# Altium PCB NBIOT.PcbDoc (part 2 of 3)
Units mm, origin at the board's own origin, x right, y up, seen from the top; angles counter-clockwise.
Board outline 152.4 x 101.6 mm, 2 copper layers (Top Layer, Bottom Layer); 66 components, 55 nets, 202 pads, 65 vias.
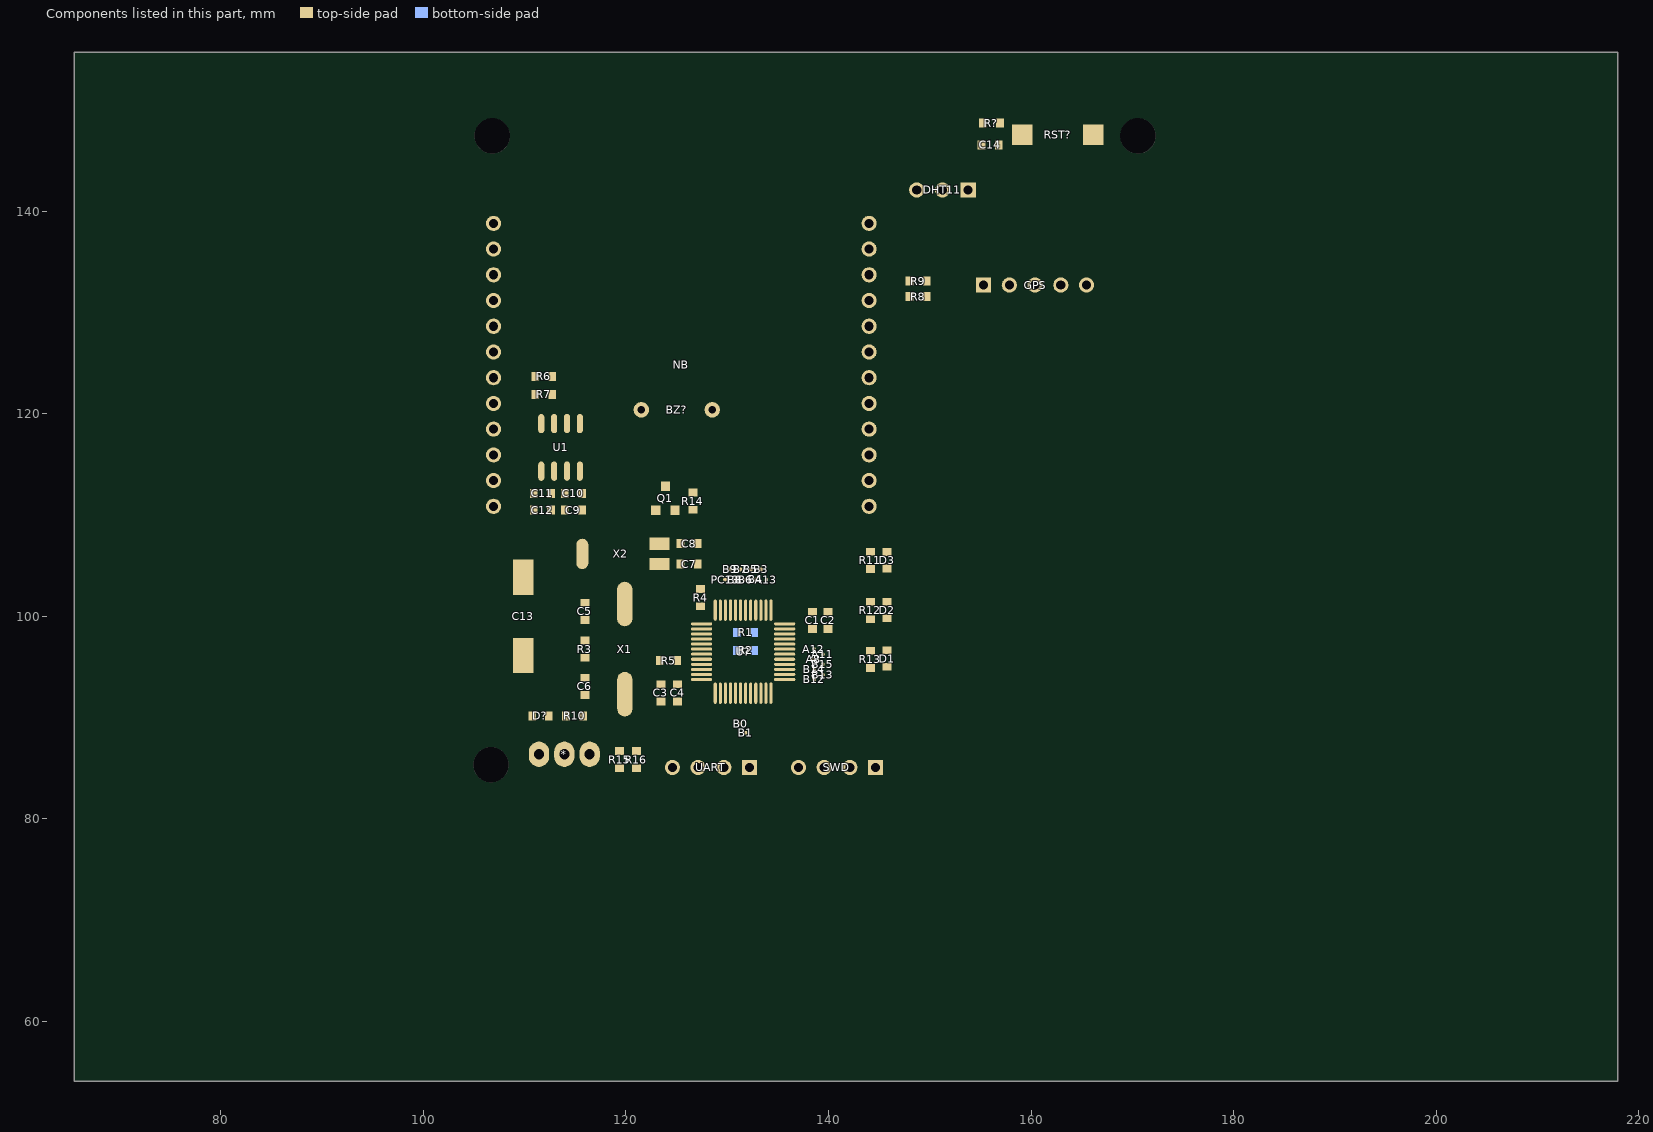
[diagram p2: the components of this part, seen from the top]

## Via types
v1: diameter 0.457, hole 0.305, Top Layer to Bottom Layer, 57 vias
v2: diameter 1.27, hole 0.711, Top Layer to Bottom Layer, 6 vias
v3: diameter 2.032, hole 1.27, Top Layer to Bottom Layer, 2 vias

## Nets (pads, with @x,y where several pads share a name; then routed paths per layer and width w, separated by ;. In a path a pad name is that pad's centre, name@x,y a point inside that pad or via, vN(x,y) a via of type N, cw(c..) or ccw(c..) an arc to the next point about the centre after c; other vN are vias at no path point) (continued)
copper on no net: (continued)
  Top Layer w0.015: 157.886,136.19 168.021,136.19 ; 157.886,136.205 168.021,136.205 ; 157.886,136.22 168.021,136.22 ; 157.886,136.235 168.021,136.235 ; 157.886,136.251 168.021,136.251 ; 157.886,136.266 168.021,136.266 ; 157.886,136.281 168.021,136.281 ; 157.886,136.296 168.021,136.296 ; 157.886,136.312 168.021,136.312 ; 157.886,136.327 168.021,136.327 ; 157.886,136.342 168.021,136.342 ; 157.886,136.357 168.021,136.357 ; 157.886,136.373 168.021,136.373 ; 157.902,136.144 168.021,136.144 ; 157.902,136.159 168.021,136.159 ; 157.902,136.174 168.021,136.174 ; 157.902,136.388 168.021,136.388 ; 157.902,136.403 168.021,136.403 ; 157.902,136.418 168.021,136.418 ; 157.902,136.434 168.006,136.434 ; 157.902,136.449 167.975,136.449 ; 157.902,136.464 167.975,136.464 ; 157.902,136.479 167.975,136.479 ; 157.902,136.495 167.975,136.495 ; 157.902,136.51 167.975,136.51 ; 157.902,136.525 167.975,136.525 ; 157.902,136.54 167.975,136.54 ; 157.902,136.555 167.975,136.555 ; 157.902,136.571 167.975,136.571 ; 157.902,136.586 167.975,136.586 ; 157.902,136.601 167.975,136.601 ; 157.902,136.616 167.975,136.616 ; 157.902,136.632 167.975,136.632 ; 157.902,136.647 167.975,136.647 ; 157.902,136.662 167.975,136.662 ; 157.902,136.677 162.245,136.677 ; 157.902,136.693 162.245,136.693 ; 157.902,136.708 162.199,136.708 ; 157.902,136.723 162.047,136.723 ; 157.902,136.738 161.879,136.738 ; 157.902,136.754 161.925,136.754 ; 157.902,136.769 161.879,136.769 ; 157.902,136.784 161.635,136.784 ; 157.902,136.799 161.605,136.799 ; 157.902,136.815 161.635,136.815 ; 157.902,136.83 161.453,136.83 ; 157.902,136.845 161.346,136.845 ; 157.902,136.86 161.361,136.86 ; 157.902,136.876 161.361,136.876 ; 157.902,136.891 161.178,136.891 ; 157.947,136.098 160.782,136.098 ; 157.947,136.129 168.021,136.129 ; 157.947,136.906 161.163,136.906 ; 157.947,136.921 161.178,136.921 ; 157.947,136.936 161.117,136.936 ; 157.947,136.952 161.011,136.952 ; 157.947,136.967 161.026,136.967 ; 157.947,136.982 161.011,136.982 ; 157.947,136.997 160.904,136.997 ; 157.947,137.013 160.873,137.013 ; 157.947,137.028 160.873,137.028 ; 157.947,137.043 160.858,137.043 ; 157.947,137.058 160.752,137.058 ; 157.947,137.074 160.752,137.074 ; 157.947,137.089 160.752,137.089 ; 157.947,137.104 160.691,137.104 ; 157.947,137.119 160.645,137.119 ; 157.947,137.135 160.645,137.135 ; 157.947,137.15 160.645,137.15 ; 157.947,137.165 160.538,137.165 ; 157.947,137.18 160.538,137.18 ; 157.947,137.196 160.538,137.196 ; 157.947,137.211 160.477,137.211 ; 157.947,137.226 160.431,137.226 ; 157.947,137.241 160.477,137.241 ; 157.947,137.257 160.431,137.257 ; 157.947,137.272 160.371,137.272 ; 157.947,137.287 160.386,137.287 ; 157.947,137.302 160.386,137.302 ; 157.963,136.114 157.978,136.114 ; 157.963,137.317 160.31,137.317 ; 157.963,137.333 157.978,137.333 ; 157.993,136.114 160.34,136.114 ; 157.993,137.333 160.279,137.333 ; 157.993,137.348 160.31,137.348 ; 157.993,137.363 160.264,137.363 ; 157.993,137.378 160.203,137.378 ; 157.993,137.394 160.203,137.394 ; 157.993,137.409 160.218,137.409 ; 157.993,137.424 160.157,137.424 ; 157.993,137.439 160.111,137.439 ; 157.993,137.455 160.157,137.455 ; 157.993,137.47 160.111,137.47 ; 157.993,137.485 160.05,137.485 ; 157.993,137.5 160.05,137.5 ; 157.993,137.516 160.05,137.516 ; 158.008,136.083 158.054,136.083 ; 158.008,137.531 160.005,137.531 ; 158.008,137.546 159.99,137.546 ; 158.008,137.561 159.99,137.561 ; 158.008,137.577 159.99,137.577 ; 158.008,137.592 159.898,137.592 ; 158.008,137.607 159.898,137.607 ; 158.008,137.622 159.898,137.622 ; 158.054,137.638 159.883,137.638 ; 158.054,137.653 159.837,137.653 ; 158.054,137.668 159.852,137.668 ; 158.054,137.683 159.837,137.683 ; 158.054,137.698 159.791,137.698 ; 158.054,137.714 159.791,137.714 ; 158.054,137.729 159.791,137.729 ; 158.054,137.744 159.791,137.744 ; 158.069,137.759 159.746,137.759 ; 158.069,137.775 158.085,137.775 ; 158.069,137.79 158.085,137.79 ; 158.069,137.805 158.085,137.805 ; 158.085,136.083 160.34,136.083 ; 158.1,137.775 159.73,137.775 ; 158.1,137.79 159.73,137.79 ; 158.1,137.805 159.73,137.805 ; 158.1,137.82 159.715,137.82 ; 158.1,137.836 159.715,137.836 ; 158.1,137.851 159.685,137.851 ; 158.115,137.866 159.685,137.866 ; 158.115,137.881 159.669,137.881 ; 158.115,137.897 159.669,137.897 ; 158.145,137.912 159.669,137.912 ; 158.161,137.927 159.624,137.927 ; 158.161,137.942 159.624,137.942 ; 158.161,137.958 159.624,137.958 ; 158.161,137.973 159.624,137.973 ; 158.161,137.988 159.624,137.988 ; 158.161,138.003 159.624,138.003 ; 158.176,138.019 159.609,138.019 ; 158.176,138.034 159.578,138.034 ; 158.176,138.049 159.578,138.049 ; 158.176,138.064 159.578,138.064 ; 158.222,138.079 159.563,138.079 ; 158.222,138.095 159.563,138.095 ; 158.222,138.11 159.563,138.11 ; 158.222,138.125 159.563,138.125 ; 158.222,138.14 159.517,138.14 ; 158.222,138.156 159.532,138.156 ; 158.222,138.171 159.517,138.171 ; 158.267,138.186 159.517,138.186 ; 158.267,138.201 159.517,138.201 ; 158.267,138.217 159.517,138.217 ; 158.267,138.232 159.502,138.232 ; 158.267,138.262 159.502,138.262 ; 158.283,138.247 159.471,138.247 ; 158.283,138.278 159.471,138.278 ; 158.283,138.293 158.298,138.293 ; 158.313,138.293 159.456,138.293 ; 158.313,138.308 159.456,138.308 ; 158.313,138.323 159.456,138.323 ; 158.328,138.339 159.456,138.339 ; 158.328,138.354 159.456,138.354 ; 158.328,138.369 159.456,138.369 ; 158.328,138.384 159.456,138.384 ; 158.328,138.4 159.41,138.4 ; 158.328,138.43 159.41,138.43 ; 158.344,138.415 159.41,138.415 ; 158.374,138.445 159.41,138.445 ; 158.374,138.46 159.395,138.46 ; 158.374,138.476 159.395,138.476 ; 158.374,138.491 159.395,138.491 ; 158.389,138.506 158.405,138.506 ; 158.389,138.521 158.405,138.521 ; 158.389,138.537 158.405,138.537 ; 158.435,138.506 159.395,138.506 ; 158.435,138.521 159.395,138.521 ; 158.435,138.537 159.395,138.537 ; 158.435,138.552 159.395,138.552 ; 158.435,138.567 159.365,138.567 ; 158.435,138.582 159.365,138.582 ; 158.435,138.598 159.365,138.598 ; 158.435,138.613 159.349,138.613 ; 158.45,138.628 159.349,138.628 ; 158.466,138.643 159.349,138.643 ; 158.481,138.659 159.349,138.659 ; 158.481,138.689 159.319,138.689 ; 158.496,138.674 159.349,138.674 ; 158.496,138.704 159.304,138.704 ; 158.496,138.72 158.511,138.72 ; 158.496,138.735 158.511,138.735 ; 158.496,138.75 158.511,138.75 ; 158.526,138.72 159.304,138.72 ; 158.526,138.735 159.304,138.735 ; 158.542,138.75 159.304,138.75 ; 158.542,138.765 159.304,138.765 ; 158.542,138.781 159.288,138.781 ; 158.542,138.796 159.288,138.796 ; 158.542,138.811 159.288,138.811 ; 158.587,138.826 159.288,138.826 ; 158.587,138.857 159.288,138.857 ; 158.603,138.841 159.288,138.841 ; 158.603,138.872 159.288,138.872 ; 158.648,138.887 159.288,138.887 ; 158.648,138.902 159.288,138.902 ; 158.648,138.918 159.288,138.918 ; 158.664,138.933 159.288,138.933 ; 158.709,138.948 159.288,138.948 ; 158.709,138.963 159.288,138.963 ; 158.709,138.979 159.288,138.979 ; 158.709,138.994 158.725,138.994 ; 158.709,139.009 158.725,139.009 ; 158.709,139.024 158.725,139.024 ; 158.74,138.994 159.288,138.994 ; 158.74,139.009 159.288,139.009 ; 158.74,139.024 159.288,139.024 ; 158.755,139.04 159.288,139.04 ; 158.801,139.055 159.288,139.055 ; 158.801,139.07 159.288,139.07 ; 158.801,139.085 159.288,139.085 ; 158.816,139.101 159.288,139.101 ; 158.816,139.116 159.288,139.116 ; 158.816,139.131 159.288,139.131 ; 158.862,139.146 159.288,139.146 ; 158.862,139.162 159.288,139.162 ; 158.862,139.177 159.288,139.177 ; 158.877,139.192 158.892,139.192 ; 158.907,139.192 159.288,139.192 ; 158.923,139.207 159.288,139.207 ; 158.923,139.222 159.288,139.222 ; 158.923,139.238 159.288,139.238 ; 158.938,139.253 159.288,139.253 ; 158.968,139.268 159.288,139.268 ; 158.984,139.283 159.288,139.283 ; 158.984,139.299 159.288,139.299 ; 159.029,139.314 159.258,139.314 ; 159.029,139.329 159.258,139.329 ; 159.029,139.344 159.258,139.344 ; 159.045,139.36 159.06,139.36 ; 159.075,139.36 159.243,139.36 ; 159.09,139.375 159.243,139.375 ; 159.09,139.39 159.243,139.39 ; 159.09,139.405 159.243,139.405 ; 159.121,139.421 159.243,139.421 ; 159.136,139.436 159.243,139.436 ; 159.136,139.451 159.243,139.451 ; 159.136,139.466 159.243,139.466 ; 159.136,139.482 159.243,139.482 ; 159.136,139.497 159.243,139.497 ; 159.136,139.512 159.243,139.512 ; 159.136,139.527 159.243,139.527 ; 159.136,139.543 159.243,139.543 ; 159.136,139.558 159.243,139.558 ; 159.136,139.573 159.243,139.573 ; 159.136,139.588 159.243,139.588 ; 159.136,139.603 159.243,139.603 ; 159.136,139.619 159.243,139.619 ; 159.136,139.634 159.243,139.634 ; 159.136,139.649 159.243,139.649 ; 159.136,139.664 159.243,139.664 ; 159.136,139.68 159.243,139.68 ; 159.136,139.695 159.243,139.695 ; 159.136,139.71 159.243,139.71 ; 159.136,139.725 159.258,139.725 ; 159.136,139.741 159.258,139.741 ; 159.136,139.756 159.288,139.756 ; 159.136,139.771 159.288,139.771 ; 159.136,139.786 159.288,139.786 ; 159.136,139.802 159.288,139.802 ; 159.136,139.817 159.288,139.817 ; 159.136,139.832 159.288,139.832 ; 159.151,139.847 159.288,139.847 ; 159.151,139.863 159.288,139.863 ; 159.151,139.878 159.288,139.878 ; 159.182,139.893 159.288,139.893 ; 159.182,139.908 159.304,139.908 ; 159.182,139.924 159.304,139.924 ; 159.182,139.939 159.304,139.939 ; 159.182,139.954 159.304,139.954 ; 159.182,139.969 159.304,139.969 ; 159.182,139.984 159.304,139.984 ; 159.182,140 159.304,140 ; 159.197,140.015 159.349,140.015 ; 159.197,140.03 159.349,140.03 ; 159.197,140.045 159.349,140.045 ; 159.197,140.061 159.349,140.061 ; 159.212,140.091 159.228,140.091 ; 159.212,140.106 159.228,140.106 ; 159.228,140.076 159.349,140.076 ; 159.243,140.091 159.349,140.091 ; 159.243,140.106 159.349,140.106 ; 159.243,140.122 159.395,140.122 ; 159.243,140.137 159.395,140.137 ; 159.243,140.152 159.395,140.152 ; 159.243,140.167 159.395,140.167 ; 159.243,140.183 159.41,140.183 ; 159.243,140.198 159.41,140.198 ; 159.258,139.36 159.288,139.36 ; 159.258,140.213 159.41,140.213 ; 159.273,139.314 159.288,139.314 ; 159.273,139.329 159.288,139.329 ; 159.273,139.344 159.288,139.344 ; 159.273,139.725 159.288,139.725 ; 159.273,139.741 159.288,139.741 ; 159.288,140.228 159.456,140.228 ; 159.304,140.244 159.456,140.244 ; 159.304,140.259 159.456,140.259 ; 159.304,140.274 159.456,140.274 ; 159.304,140.289 159.456,140.289 ; 159.304,140.305 159.319,140.305 ; 159.304,140.32 159.319,140.32 ; 159.334,138.689 159.349,138.689 ; 159.334,140.305 159.456,140.305 ; 159.334,140.32 159.456,140.32 ; 159.349,140.335 159.502,140.335 ; 159.365,140.35 159.517,140.35 ; 159.365,140.365 159.517,140.365 ; 159.365,140.381 159.38,140.381 ; 159.38,138.567 159.395,138.567 ; 159.38,138.582 159.395,138.582 ; 159.395,140.381 159.517,140.381 ; 159.395,140.396 159.517,140.396 ; 159.395,140.411 159.517,140.411 ; 159.395,140.426 159.517,140.426 ; 159.41,140.442 159.532,140.442 ; 159.41,140.457 159.441,140.457 ; 159.41,140.472 159.563,140.472 ; 159.456,140.457 159.563,140.457 ; 159.456,140.487 159.563,140.487 ; 159.456,140.503 159.563,140.503 ; 159.456,140.518 159.563,140.518 ; 159.456,140.533 159.563,140.533 ; 159.456,140.548 159.563,140.548 ; 159.456,140.564 159.563,140.564 ; 159.456,140.579 159.563,140.579 ; 159.456,140.594 159.563,140.594 ; 159.456,140.609 159.609,140.609 ; 159.456,140.625 159.609,140.625 ; 159.456,140.64 159.609,140.64 ; 159.456,140.655 159.609,140.655 ; 159.471,140.67 159.609,140.67 ; 159.471,140.686 159.609,140.686 ; 159.471,140.701 159.487,140.701 ; 159.487,138.247 159.502,138.247 ; 159.487,138.278 159.502,138.278 ; 159.502,140.701 159.624,140.701 ; 159.502,140.716 159.624,140.716 ; 159.502,140.731 159.624,140.731 ; 159.502,140.746 159.624,140.746 ; 159.517,140.762 159.624,140.762 ; 159.517,140.777 159.624,140.777 ; 159.517,140.792 159.654,140.792 ; 159.517,140.807 159.654,140.807 ; 159.517,140.823 159.669,140.823 ; 159.517,140.838 159.669,140.838 ; 159.517,140.853 159.669,140.853 ; 159.532,140.868 159.669,140.868 ; 159.548,140.442 159.563,140.442 ; 159.563,140.884 159.685,140.884 ; 159.563,140.899 159.685,140.899 ; 159.563,140.914 159.685,140.914 ; 159.563,140.929 159.73,140.929 ; 159.563,140.945 159.73,140.945 ; 159.563,140.96 159.73,140.96 ; 159.578,140.975 159.73,140.975 ; 159.609,140.99 159.73,140.99 ; 159.609,141.006 159.73,141.006 ; 159.609,141.021 159.73,141.021 ; 159.624,141.036 159.776,141.036 ; 159.624,141.051 159.776,141.051 ; 159.624,141.067 159.776,141.067 ; 159.624,141.082 159.776,141.082 ; 159.669,141.097 159.791,141.097 ; 159.669,141.112 159.791,141.112 ; 159.669,141.127 159.791,141.127 ; 159.669,141.143 159.791,141.143 ; 159.669,141.158 159.837,141.158 ; 159.669,141.173 159.837,141.173 ; 159.685,141.188 159.837,141.188 ; 159.7,137.851 159.715,137.851 ; 159.715,141.204 159.837,141.204 ; 159.715,141.219 159.837,141.219 ; 159.715,141.234 159.837,141.234 ; 159.73,141.249 159.837,141.249 ; 159.73,141.265 159.837,141.265 ; 159.73,141.28 159.837,141.28 ; 159.73,141.295 159.852,141.295 ; 159.73,141.31 159.746,141.31 ; 159.776,141.31 159.883,141.31 ; 159.776,141.326 159.883,141.326 ; 159.776,141.341 159.883,141.341 ; 159.776,141.356 159.898,141.356 ; 159.776,141.371 159.944,141.371 ; 159.776,141.387 159.913,141.387 ; 159.776,141.402 159.944,141.402 ; 159.791,141.417 159.807,141.417 ; 159.791,141.432 159.944,141.432 ; 159.807,137.698 159.822,137.698 ; 159.807,141.448 159.944,141.448 ; 159.822,141.417 159.944,141.417 ; 159.837,141.463 159.959,141.463 ; 159.837,141.478 159.99,141.478 ; 159.837,141.493 159.99,141.493 ; 159.837,141.508 159.99,141.508 ; 159.883,141.524 160.005,141.524 ; 159.883,141.539 160.005,141.539 ; 159.883,141.554 160.02,141.554 ; 159.883,141.569 160.05,141.569 ; 159.883,141.6 160.05,141.6 ; 159.898,141.585 160.05,141.585 ; 159.898,141.615 160.05,141.615 ; 159.898,141.63 160.05,141.63 ; 159.913,137.592 159.944,137.592 ; 159.929,141.661 160.05,141.661 ; 159.944,141.646 160.05,141.646 ; 159.944,141.676 160.05,141.676 ; 159.944,141.691 160.096,141.691 ; 159.944,141.707 160.111,141.707 ; 159.944,141.722 160.111,141.722 ; 159.959,141.737 159.974,141.737 ; 159.974,141.463 159.99,141.463 ; 159.99,141.737 160.111,141.737 ; 159.99,141.752 160.157,141.752 ; 159.99,141.768 160.142,141.768 ; 159.99,141.783 160.157,141.783 ; 160.005,141.798 160.157,141.798 ; 160.005,141.813 160.157,141.813 ; 160.005,141.829 160.157,141.829 ; 160.02,141.539 160.05,141.539 ; 160.05,141.844 160.157,141.844 ; 160.05,141.859 160.203,141.859 ; 160.05,141.874 160.203,141.874 ; 160.05,141.889 160.203,141.889 ; 160.05,141.905 160.066,141.905 ; 160.05,141.92 160.081,141.92 ; 160.05,141.935 160.218,141.935 ; 160.081,141.905 160.218,141.905 ; 160.096,141.92 160.218,141.92 ; 160.111,141.95 160.264,141.95 ; 160.111,141.966 160.264,141.966 ; 160.111,141.981 160.264,141.981 ; 160.111,141.996 160.264,141.996 ; 160.127,141.737 160.142,141.737 ; 160.157,142.011 160.31,142.011 ; 160.157,142.027 160.31,142.027 ; 160.157,142.042 160.325,142.042 ; 160.157,142.057 160.188,142.057 ; 160.203,142.057 160.325,142.057 ; 160.203,142.072 160.371,142.072 ; 160.203,142.088 160.371,142.088 ; 160.203,142.103 160.371,142.103 ; 160.218,142.118 160.386,142.118 ; 160.218,142.133 160.233,142.133 ; 160.218,142.149 160.386,142.149 ; 160.249,142.133 160.386,142.133 ; 160.264,142.164 160.431,142.164 ; 160.294,137.333 160.31,137.333 ; 160.31,142.179 160.431,142.179 ; 160.31,142.194 160.431,142.194 ; 160.31,142.21 160.431,142.21 ; 160.325,142.225 160.477,142.225 ; 160.325,142.24 160.477,142.24 ; 160.325,142.255 160.477,142.255 ; 160.325,142.27 160.492,142.27 ; 160.371,142.286 160.508,142.286 ; 160.371,142.301 160.492,142.301 ; 160.371,142.316 160.508,142.316 ; 160.386,142.331 160.538,142.331 ; 160.386,142.347 160.538,142.347 ; 160.386,142.362 160.538,142.362 ; 160.386,142.377 160.401,142.377 ; 160.401,142.133 160.416,142.133 ; 160.416,136.114 160.462,136.114 ; 160.416,142.377 160.538,142.377 ; 160.431,142.392 160.584,142.392 ; 160.431,142.408 160.584,142.408 ; 160.431,142.423 160.599,142.423 ; 160.477,142.438 160.599,142.438 ; 160.477,142.453 160.63,142.453 ; 160.477,142.469 160.63,142.469 ; 160.477,142.484 160.645,142.484 ; 160.492,142.499 160.645,142.499 ; 160.523,142.286 160.538,142.286 ; 160.523,142.316 160.538,142.316 ; 160.538,142.514 160.691,142.514 ; 160.538,142.53 160.675,142.53 ; 160.538,142.545 160.706,142.545 ; 160.538,142.56 160.706,142.56 ; 160.538,142.575 160.706,142.575 ; 160.538,142.591 160.553,142.591 ; 160.553,137.18 160.584,137.18 ; 160.553,142.377 160.569,142.377 ; 160.569,142.591 160.752,142.591 ; 160.584,142.606 160.752,142.606 ; 160.584,142.636 160.752,142.636 ; 160.599,142.621 160.752,142.621 ; 160.599,142.651 160.614,142.651 ; 160.63,142.651 160.767,142.651 ; 160.645,142.667 160.797,142.667 ; 160.645,142.682 160.797,142.682 ; 160.645,142.697 160.812,142.697 ; 160.66,142.499 160.675,142.499 ; 160.691,142.712 160.858,142.712 ; 160.691,142.728 160.858,142.728 ; 160.691,142.743 160.858,142.743 ; 160.706,142.758 160.873,142.758 ; 160.721,142.575 160.736,142.575 ; 160.752,142.773 160.919,142.773 ; 160.752,142.789 160.904,142.789 ; 160.752,142.804 160.919,142.804 ; 160.752,142.819 160.965,142.819 ; 160.752,142.85 160.965,142.85 ; 160.767,142.834 160.965,142.834 ; 160.782,142.651 160.797,142.651 ; 160.797,142.865 160.98,142.865 ; 160.812,142.88 161.011,142.88 ; 160.812,142.895 161.011,142.895 ; 160.812,142.911 161.011,142.911 ; 160.873,142.926 161.072,142.926 ; 160.873,142.941 161.072,142.941 ; 160.873,142.956 161.072,142.956 ; 160.889,142.758 160.904,142.758 ; 160.919,142.972 161.133,142.972 ; 160.965,142.987 161.407,142.987 ; 160.965,143.002 161.407,143.002 ; 160.965,143.017 161.437,143.017 ; 161.011,143.032 161.498,143.032 ; 161.011,143.063 161.498,143.063 ; 161.026,143.048 161.498,143.048 ; 161.026,143.078 161.041,143.078 ; 161.056,143.078 161.514,143.078 ; 161.087,143.093 161.574,143.093 ; 161.087,143.109 161.605,143.109 ; 161.087,143.124 161.605,143.124 ; 161.133,143.139 161.62,143.139 ; 161.178,143.154 161.666,143.154 ; 161.178,143.17 161.666,143.17 ; 161.178,143.185 161.681,143.185 ; 161.193,142.972 161.392,142.972 ; 161.285,143.2 161.757,143.2 ; 161.285,143.215 161.757,143.215 ; 161.285,143.231 161.773,143.231 ; 161.3,142.941 161.331,142.941 ; 161.346,143.246 161.879,143.246 ; 161.346,143.276 162.047,143.276 ; 161.361,143.261 161.376,143.261 ; 161.376,136.86 161.392,136.86 ; 161.376,136.876 161.392,136.876 ; 161.392,143.261 162.062,143.261 ; 161.392,143.292 162.306,143.292 ; 161.437,136.098 168.006,136.098 ; 161.453,143.307 162.26,143.307 ; 161.453,143.322 162.26,143.322 ; 161.453,143.337 162.26,143.337 ; 161.514,136.114 161.574,136.114 ; 161.514,143.353 162.26,143.353 ; 161.559,143.383 162.215,143.383 ; 161.574,143.368 162.215,143.368 ; 161.574,143.398 162.245,143.398 ; 161.59,136.114 167.975,136.114 ; 161.605,136.083 167.975,136.083 ; 161.696,143.185 161.712,143.185 ; 161.757,143.444 163.083,143.444 ; 161.773,143.413 163.098,143.413 ; 161.773,143.429 163.098,143.429 ; 161.879,143.459 164.531,143.459 ; 161.94,143.474 164.455,143.474 ; 161.94,143.49 164.47,143.49 ; 161.955,143.505 164.455,143.505 ; 162.047,143.52 164.196,143.52 ; 162.047,143.535 164.104,143.535 ; 162.047,143.551 164.196,143.551 ; 162.093,143.261 162.687,143.261 ; 162.093,143.276 162.687,143.276 ; 162.093,143.566 162.367,143.566 ; 162.108,143.246 162.641,143.246 ; 162.108,143.581 162.123,143.581 ; 162.108,143.596 162.123,143.596 ; 162.108,143.612 162.123,143.612 ; 162.138,143.581 162.367,143.581 ; 162.138,143.596 162.367,143.596 ; 162.138,143.612 162.367,143.612 ; 162.154,143.2 162.596,143.2 ; 162.154,143.231 162.596,143.231 ; 162.169,143.215 162.596,143.215 ; 162.215,143.185 162.519,143.185 ; 162.215,143.627 162.413,143.627 ; 162.215,143.642 162.413,143.642 ; 162.215,143.657 162.413,143.657 ; 162.26,143.154 162.474,143.154 ; 162.26,143.673 162.428,143.673 ; 162.26,143.703 162.474,143.703 ; 162.276,143.17 162.458,143.17 ; 162.276,143.688 162.291,143.688 ; 162.306,143.688 162.489,143.688 ; 162.306,143.718 162.474,143.718 ; 162.321,143.139 162.367,143.139 ; 162.367,143.734 162.733,143.734 ; 162.367,143.749 162.748,143.749 ; 162.367,143.764 162.748,143.764 ; 162.382,143.139 162.413,143.139 ; 162.428,143.139 162.458,143.139 ; 162.428,143.292 162.443,143.292 ; 162.458,143.779 162.794,143.779 ; 162.474,143.292 162.733,143.292 ; 162.519,143.307 162.794,143.307 ; 162.535,143.322 162.794,143.322 ; 162.535,143.81 162.855,143.81 ; 162.55,143.337 162.794,143.337 ; 162.55,143.825 162.855,143.825 ; 162.565,143.794 162.855,143.794 ; 162.596,143.353 162.855,143.353 ; 162.626,140.884 163.921,140.884 ; 162.626,140.899 163.891,140.899 ; 162.626,140.914 163.891,140.914 ; 162.626,140.929 163.891,140.929 ; 162.626,140.945 163.891,140.945 ; 162.626,140.96 163.876,140.96 ; 162.626,143.368 162.9,143.368 ; 162.626,143.383 162.9,143.383 ; 162.626,143.398 162.9,143.398 ; 162.641,140.823 162.657,140.823 ; 162.641,140.868 163.937,140.868 ; 162.641,140.975 163.876,140.975 ; 162.657,140.305 163.617,140.305 ; 162.672,140.289 163.617,140.289 ; 162.672,140.32 163.617,140.32 ; 162.672,140.99 163.876,140.99 ; 162.672,141.006 163.876,141.006 ; 162.687,140.335 163.617,140.335 ; 162.687,140.35 163.617,140.35 ; 162.687,140.365 163.617,140.365 ; 162.687,140.823 163.982,140.823 ; 162.687,140.838 163.967,140.838 ; 162.687,140.853 163.967,140.853 ; 162.687,141.021 163.876,141.021 ; 162.702,140.381 163.601,140.381 ; 162.702,141.036 163.876,141.036 ; 162.702,143.84 162.946,143.84 ; 162.702,143.855 162.946,143.855 ; 162.702,143.871 162.961,143.871 ; 162.733,140.777 162.9,140.777 ; 162.748,141.051 163.876,141.051 ; 162.748,141.067 163.876,141.067 ; 162.748,143.886 162.778,143.886 ; 162.778,140.274 163.601,140.274 ; 162.794,138.857 163.022,138.857 ; 162.794,138.872 163.038,138.872 ; 162.794,138.887 163.068,138.887 ; 162.794,138.902 163.068,138.902 ; 162.794,138.918 163.068,138.918 ; 162.794,138.933 163.114,138.933 ; 162.794,141.082 163.83,141.082 ; 162.794,143.886 162.961,143.886 ; 162.809,138.781 162.839,138.781 ; 162.809,138.796 163.007,138.796 ; 162.809,138.811 163.007,138.811 ; 162.809,138.826 163.007,138.826 ; 162.809,138.841 163.022,138.841 ; 162.809,138.948 163.129,138.948 ; 162.809,138.963 163.129,138.963 ; 162.809,138.979 163.129,138.979 ; 162.809,138.994 163.159,138.994 ; 162.809,140.396 162.839,140.396 ; 162.809,140.411 162.839,140.411 ; 162.809,140.426 162.839,140.426 ; 162.809,140.792 162.9,140.792 ; 162.824,139.009 163.159,139.009 ; 162.824,139.024 163.175,139.024 ; 162.824,140.807 162.9,140.807 ; 162.839,143.916 163.007,143.916 ; 162.855,138.72 162.9,138.72 ; 162.855,138.735 162.916,138.735 ; 162.855,138.75 162.931,138.75 ; 162.855,138.765 162.946,138.765 ; 162.855,138.781 163.007,138.781 ; 162.855,140.396 163.571,140.396 ; 162.855,140.411 163.571,140.411 ; 162.855,140.426 163.586,140.426 ; 162.855,143.901 163.007,143.901 ; 162.855,143.932 162.87,143.932 ; 162.87,138.704 162.885,138.704 ; 162.87,143.353 162.885,143.353 ; 162.885,143.932 163.007,143.932 ; 162.9,139.04 163.19,139.04 ; 162.9,143.947 163.053,143.947 ; 162.916,143.962 163.068,143.962 ; 162.916,143.977 163.068,143.977 ; 162.916,143.993 162.931,143.993 ; 162.931,138.735 162.946,138.735 ; 162.946,140.244 163.601,140.244 ; 162.946,140.442 163.342,140.442 ; 162.946,141.097 163.586,141.097 ; 162.946,141.112 162.977,141.112 ; 162.946,141.127 163.22,141.127 ; 162.946,143.993 163.068,143.993 ; 162.961,139.07 163.22,139.07 ; 162.961,139.085 163.22,139.085 ; 162.961,140.228 163.571,140.228 ; 162.961,140.259 163.601,140.259 ; 162.961,143.566 163.982,143.566 ; 162.961,144.008 163.068,144.008 ; 162.961,144.023 163.114,144.023 ; 162.961,144.038 163.114,144.038 ; 162.977,139.055 163.22,139.055 ; 162.992,141.112 163.129,141.112 ; 163.007,143.581 163.937,143.581 ; 163.007,143.596 163.921,143.596 ; 163.007,143.612 163.921,143.612 ; 163.007,144.054 163.129,144.054 ; 163.007,144.069 163.175,144.069 ; 163.007,144.084 163.175,144.084 ; 163.022,144.099 163.175,144.099 ; 163.038,138.841 163.053,138.841 ; 163.038,138.857 163.053,138.857 ; 163.038,140.472 163.342,140.472 ; 163.053,140.457 163.342,140.457 ; 163.068,144.115 163.19,144.115 ; 163.068,144.13 163.175,144.13 ; 163.068,144.145 163.19,144.145 ; 163.068,144.16 163.098,144.16 ; 163.083,139.116 163.098,139.116 ; 163.083,139.131 163.098,139.131 ; 163.098,139.101 163.236,139.101 ; 163.114,139.116 163.22,139.116 ; 163.114,139.131 163.22,139.131 ; 163.114,144.16 163.236,144.16 ; 163.114,144.191 163.266,144.191 ; 163.114,144.206 163.281,144.206 ; 163.129,139.146 163.144,139.146 ; 163.129,140.198 163.495,140.198 ; 163.129,140.213 163.144,140.213 ; 163.129,143.627 164.059,143.627 ; 163.129,143.657 164.043,143.657 ; 163.129,144.175 163.266,144.175 ; 163.144,138.948 163.159,138.948 ; 163.144,138.979 163.159,138.979 ; 163.144,140.487 163.175,140.487 ; 163.144,143.642 164.043,143.642 ; 163.159,138.247 164.912,138.247 ; 163.159,140.183 163.449,140.183 ; 163.159,140.213 163.479,140.213 ; 163.175,138.262 164.897,138.262 ; 163.175,138.278 164.897,138.278 ; 163.175,138.293 164.196,138.293 ; 163.175,138.308 164.196,138.308 ; 163.175,138.323 164.196,138.323 ; 163.175,138.339 164.135,138.339 ; 163.175,138.354 163.205,138.354 ; 163.175,139.146 163.22,139.146 ; 163.175,139.177 163.251,139.177 ; 163.175,140.167 163.403,140.167 ; 163.175,143.673 164.196,143.673 ; 163.175,144.221 163.342,144.221 ; 163.175,144.236 163.342,144.236 ; 163.175,144.252 163.342,144.252 ; 163.175,144.267 163.342,144.267 ; 163.19,138.232 164.912,138.232 ; 163.19,139.162 163.205,139.162 ; 163.19,140.152 163.205,140.152 ; 163.205,144.115 163.22,144.115 ; 163.22,138.201 164.897,138.201 ; 163.22,138.384 163.266,138.384 ; 163.22,139.162 163.251,139.162 ; 163.22,140.137 163.388,140.137 ; 163.22,144.282 163.388,144.282 ; 163.22,144.297 163.388,144.297 ; 163.22,144.313 163.388,144.313 ; 163.236,143.093 163.982,143.093 ; 163.236,143.109 164.013,143.109 ; 163.236,143.124 163.998,143.124 ; 163.236,143.139 164.196,143.139 ; 163.236,143.154 164.257,143.154 ; 163.236,143.17 164.272,143.17 ; 163.236,143.718 164.211,143.718 ; 163.251,141.127 163.662,141.127 ; 163.251,143.688 164.196,143.688 ; 163.251,143.703 164.196,143.703 ; 163.266,138.217 164.912,138.217 ; 163.266,140.152 163.312,140.152 ; 163.281,138.354 163.464,138.354 ; 163.281,143.078 163.784,143.078 ; 163.281,143.185 163.419,143.185 ; 163.281,144.328 163.449,144.328 ; 163.281,144.343 163.479,144.343 ; 163.281,144.358 163.449,144.358 ; 163.327,138.369 163.51,138.369 ; 163.342,138.186 164.897,138.186 ; 163.342,140.152 163.388,140.152 ; 163.342,140.777 164.028,140.777 ; 163.342,140.792 164.028,140.792 ; 163.342,140.807 164.028,140.807 ; 163.342,141.112 163.434,141.112 ; 163.342,144.374 163.495,144.374 ; 163.342,144.389 163.662,144.389 ; 163.342,144.404 163.586,144.404 ; 163.342,144.419 163.647,144.419 ; 163.358,140.122 163.373,140.122 ; 163.373,140.442 163.419,140.442 ; 163.388,143.048 163.708,143.048 ; 163.419,140.167 163.434,140.167 ; 163.434,143.063 163.662,143.063 ; 163.449,144.435 164.135,144.435 ; 163.449,144.45 164.15,144.45 ; 163.449,144.465 164.15,144.465 ; 163.464,140.183 163.479,140.183 ; 163.464,140.442 163.479,140.442 ; 163.464,141.112 163.647,141.112 ; 163.464,143.032 163.647,143.032 ; 163.495,140.762 164.074,140.762 ; 163.495,144.48 164.196,144.48 ; 163.556,140.716 164.104,140.716 ; 163.556,140.731 164.089,140.731 ; 163.571,140.746 164.089,140.746 ; 163.586,140.396 163.601,140.396 ; 163.586,140.411 163.601,140.411 ; 163.617,140.67 164.135,140.67 ; 163.617,140.686 164.135,140.686 ; 163.617,140.701 164.135,140.701 ; 163.647,144.511 163.891,144.511 ; 163.662,140.625 164.15,140.625 ; 163.662,140.655 164.15,140.655 ; 163.678,140.609 164.15,140.609 ; 163.678,140.64 163.693,140.64 ; 163.678,144.496 163.86,144.496 ; 163.693,143.185 164.302,143.185 ; 163.708,140.64 164.15,140.64 ; 163.708,141.097 163.723,141.097 ; 163.708,144.526 163.845,144.526 ; 163.723,140.564 164.15,140.564 ; 163.723,140.594 164.15,140.594 ; 163.769,140.579 164.15,140.579 ; 163.8,139.024 164.348,139.024 ; 163.815,138.948 164.79,138.948 ; 163.815,138.979 164.805,138.979 ; 163.815,139.009 164.363,139.009 ; 163.83,138.933 164.79,138.933 ; 163.83,138.963 164.79,138.963 ; 163.83,138.994 164.363,138.994 ; 163.83,143.215 164.379,143.215 ; 163.845,143.2 164.363,143.2 ; 163.86,138.902 164.79,138.902 ; 163.86,140.518 164.135,140.518 ; 163.86,140.548 164.135,140.548 ; 163.86,143.231 164.379,143.231 ; 163.876,138.369 164.043,138.369 ; 163.876,138.887 164.775,138.887 ; 163.876,138.918 164.79,138.918 ; 163.876,139.04 164.211,139.04 ; 163.876,140.533 164.135,140.533 ; 163.891,140.503 164.104,140.503 ; 163.891,144.389 163.982,144.389 ; 163.906,138.354 164.028,138.354 ; 163.906,138.384 164.043,138.384 ; 163.906,140.945 163.921,140.945 ; 163.906,144.419 164.013,144.419 ; 163.921,137.698 164.79,137.698 ; 163.921,137.714 164.379,137.714 ; 163.937,137.653 164.79,137.653 ; 163.937,137.668 164.79,137.668 ; 163.937,137.683 164.79,137.683 ; 163.937,137.729 164.379,137.729 ; 163.937,137.744 164.135,137.744 ; 163.937,137.759 163.952,137.759 ; 163.937,138.872 164.744,138.872 ; 163.937,143.413 164.683,143.413 ; 163.937,143.429 164.683,143.429 ; 163.937,144.511 163.952,144.511 ; 163.952,140.487 164.089,140.487 ; 163.952,143.444 164.729,143.444 ; 163.967,138.841 164.744,138.841 ; 163.967,138.857 164.744,138.857 ; 163.967,140.472 164.089,140.472 ; 163.967,144.511 164.241,144.511 ; 163.982,137.607 164.744,137.607 ; 163.982,137.622 164.744,137.622 ; 163.982,137.638 164.744,137.638 ; 163.982,140.457 164.089,140.457 ; 163.982,144.496 164.241,144.496 ; 163.982,144.526 164.257,144.526 ; 163.998,137.592 164.744,137.592 ; 164.013,140.442 164.089,140.442 ; 164.028,143.734 164.348,143.734 ; 164.043,137.546 164.729,137.546 ; 164.043,137.561 164.059,137.561 ; 164.043,137.577 164.744,137.577 ; 164.043,143.749 164.363,143.749 ; 164.043,143.764 164.318,143.764 ; 164.059,136.677 167.975,136.677 ; 164.059,136.693 167.975,136.693 ; 164.059,136.708 167.975,136.708 ; 164.059,138.826 164.683,138.826 ; 164.074,137.561 164.729,137.561 ; 164.089,137.531 164.699,137.531 ; 164.104,137.485 164.683,137.485 ; 164.104,137.5 164.683,137.5 ; 164.104,137.516 164.683,137.516 ; 164.104,144.541 165.034,144.541 ; 164.104,144.556 164.12,144.556 ; 164.12,137.47 164.622,137.47 ; 164.12,140.503 164.135,140.503 ; 164.135,137.455 164.592,137.455 ; 164.135,144.556 165.049,144.556 ; 164.15,137.439 164.577,137.439 ; 164.15,138.781 164.638,138.781 ; 164.15,138.796 164.638,138.796 ; 164.15,138.811 164.638,138.811 ; 164.15,143.779 164.181,143.779 ; 164.15,144.572 165.049,144.572 ; 164.15,144.587 165.08,144.587 ; 164.165,137.424 164.181,137.424 ; 164.196,137.378 164.287,137.378 ; 164.196,137.394 164.287,137.394 ; 164.196,137.409 164.287,137.409 ; 164.196,137.424 164.531,137.424 ; 164.196,138.72 164.44,138.72 ; 164.196,138.735 164.516,138.735 ; 164.196,138.75 164.501,138.75 ; 164.196,138.765 164.577,138.765 ; 164.196,143.246 164.424,143.246 ; 164.196,143.261 164.485,143.261 ; 164.196,143.276 164.47,143.276 ; 164.196,143.779 164.44,143.779 ; 164.196,144.617 164.638,144.617 ; 164.211,143.139 164.241,143.139 ; 164.211,144.602 164.638,144.602 ; 164.226,136.723 167.975,136.723 ; 164.226,143.794 165.003,143.794 ; 164.226,143.81 165.003,143.81 ; 164.226,144.633 164.638,144.633 ; 164.241,143.825 165.019,143.825 ; 164.257,143.292 164.546,143.292 ; 164.287,143.398 165.08,143.398 ; 164.302,143.307 165.064,143.307 ; 164.302,143.322 165.049,143.322 ; 164.302,143.337 165.064,143.337 ; 164.302,143.353 165.064,143.353 ; 164.302,143.368 165.064,143.368 ; 164.318,138.293 164.882,138.293 ; 164.318,143.383 165.064,143.383 ; 164.318,143.84 164.333,143.84 ; 164.333,138.323 164.897,138.323 ; 164.348,138.308 164.882,138.308 ; 164.348,143.84 165.064,143.84 ; 164.363,136.754 167.975,136.754 ; 164.363,143.855 164.744,143.855 ; 164.363,143.871 164.729,143.871 ; 164.379,138.171 164.836,138.171 ; 164.379,143.886 164.394,143.886 ; 164.409,138.156 164.805,138.156 ; 164.409,143.886 164.531,143.886 ; 164.424,136.738 167.975,136.738 ; 164.424,136.769 167.975,136.769 ; 164.424,138.14 164.805,138.14 ; 164.44,137.394 164.455,137.394 ; 164.44,138.339 164.836,138.339 ; 164.44,143.246 164.455,143.246 ; 164.47,138.125 164.79,138.125 ; 164.47,138.994 164.851,138.994 ; 164.47,139.009 164.866,139.009 ; 164.47,139.024 164.882,139.024 ; 164.501,137.729 164.79,137.729 ; 164.516,137.714 164.79,137.714 ; 164.531,138.079 164.683,138.079 ; 164.531,138.095 164.729,138.095 ; 164.531,138.11 164.729,138.11 ; 164.531,139.04 164.836,139.04 ; 164.531,143.779 164.943,143.779 ; 164.638,140.899 165.278,140.899 ; 164.638,140.914 165.278,140.914 ; 164.638,140.945 165.217,140.945 ; 164.638,140.96 165.217,140.96 ; 164.638,140.975 164.668,140.975 ; 164.653,140.823 164.668,140.823 ; 164.653,140.868 164.668,140.868 ; 164.653,140.884 165.278,140.884 ; 164.653,140.929 165.217,140.929 ; 164.683,140.868 164.699,140.868 ; 164.683,140.975 165.171,140.975 ; 164.683,140.99 165.125,140.99 ; 164.683,141.006 165.125,141.006 ; 164.683,141.021 164.699,141.021 ; 164.683,144.602 165.125,144.602 ; 164.683,144.633 165.141,144.633 ; 164.699,137.744 164.729,137.744 ; 164.699,138.079 164.729,138.079 ; 164.699,143.413 164.729,143.413 ; 164.699,143.429 164.729,143.429 ; 164.699,144.617 165.125,144.617 ; 164.714,140.183 165.232,140.183 ; 164.729,140.198 165.217,140.198 ; 164.729,140.213 165.217,140.213 ; 164.729,140.228 165.171,140.228 ; 164.729,141.021 165.11,141.021 ; 164.729,143.292 164.76,143.292 ; 164.744,140.244 164.836,140.244 ; 164.744,140.259 164.851,140.259 ; 164.744,140.274 164.821,140.274 ; 164.744,140.289 164.805,140.289 ; 164.744,140.305 164.805,140.305 ; 164.744,140.32 164.79,140.32 ; 164.744,141.036 164.988,141.036 ; 164.76,137.744 164.775,137.744 ; 164.76,140.868 165.339,140.868 ; 164.775,137.638 164.79,137.638 ; 164.775,140.167 165.232,140.167 ; 164.775,141.051 164.912,141.051 ; 164.775,141.067 164.943,141.067 ; 164.775,143.292 165.064,143.292 ; 164.79,143.261 165.11,143.261 ; 164.805,140.152 165.278,140.152 ; 164.805,141.082 164.866,141.082 ; 164.805,143.276 165.125,143.276 ; 164.805,143.444 165.308,143.444 ; 164.805,143.855 164.821,143.855 ; 164.821,140.838 165.369,140.838 ; 164.836,140.137 165.232,140.137 ; 164.836,140.853 165.384,140.853 ; 164.836,143.246 165.125,143.246 ; 164.836,143.413 165.308,143.413 ; 164.836,143.429 165.324,143.429 ; 164.836,143.871 165.08,143.871 ; 164.851,140.045 164.866,140.045 ; 164.851,140.061 165.293,140.061 ; 164.851,140.076 165.293,140.076 ; 164.851,140.091 165.278,140.091 ; 164.851,140.106 165.278,140.106 ; 164.851,140.122 165.278,140.122 ; 164.851,140.823 165.384,140.823 ; 164.851,143.855 165.064,143.855 ; 164.866,140.792 165.43,140.792 ; 164.882,140.015 165.293,140.015 ; 164.882,140.03 165.308,140.03 ; 164.882,140.045 165.308,140.045 ; 164.882,140.777 165.476,140.777 ; 164.882,140.807 165.43,140.807 ; 164.897,139.969 165.232,139.969 ; 164.897,139.984 165.217,139.984 ; 164.897,140 165.232,140 ; 164.897,143.231 165.217,143.231 ; 164.897,143.886 164.927,143.886 ; 164.912,139.939 164.927,139.939 ; 164.912,139.954 165.171,139.954 ; 164.912,140.244 164.927,140.244 ; 164.912,143.2 165.171,143.2 ; 164.912,143.215 165.186,143.215 ; 164.927,140.259 165.171,140.259 ; 164.943,139.924 165.08,139.924 ; 164.943,139.939 165.08,139.939 ; 164.943,140.762 165.491,140.762 ; 164.943,143.459 165.491,143.459 ; 164.943,143.886 165.171,143.886 ; 164.958,139.908 165.049,139.908 ; 164.958,140.731 165.506,140.731 ; 164.958,140.746 165.506,140.746 ; 164.973,140.716 165.506,140.716 ; 164.973,143.49 165.705,143.49 ; 164.973,144.648 165.171,144.648 ; 164.988,140.244 165.171,140.244 ; 164.988,143.901 166.146,143.901 ; 164.988,143.916 166.116,143.916 ; 165.003,138.994 165.232,138.994 ; 165.003,143.932 166.116,143.932 ; 165.019,138.948 165.217,138.948 ; 165.019,138.979 165.034,138.979 ; 165.019,139.024 165.232,139.024 ; 165.019,143.185 165.278,143.185 ; 165.019,143.474 165.705,143.474 ; 165.019,143.505 165.705,143.505 ; 165.049,138.963 165.217,138.963 ; 165.049,138.979 165.217,138.979 ; 165.049,139.009 165.232,139.009 ; 165.049,140.67 165.583,140.67 ; 165.049,140.686 165.583,140.686 ; 165.049,143.154 165.278,143.154 ; 165.049,144.663 165.217,144.663 ; 165.049,144.678 165.217,144.678 ; 165.064,143.139 165.324,143.139 ; 165.064,143.17 165.293,143.17 ; 165.064,143.947 166.192,143.947 ; 165.064,144.694 165.232,144.694 ; 165.08,140.701 165.598,140.701 ; 165.08,143.977 165.095,143.977 ; 165.08,144.709 166.207,144.709 ; 165.08,144.724 165.095,144.724 ; 165.095,136.784 167.975,136.784 ; 165.095,138.933 165.217,138.933 ; 165.095,143.855 165.11,143.855 ; 165.11,136.799 167.975,136.799 ; 165.11,138.887 165.217,138.887 ; 165.11,138.902 165.217,138.902 ; 165.11,138.918 165.217,138.918 ; 165.11,139.04 165.217,139.04 ; 165.11,144.724 166.253,144.724 ; 165.11,144.739 166.207,144.739 ; 165.125,136.815 167.975,136.815 ; 165.125,138.841 165.156,138.841 ; 165.125,138.857 165.156,138.857 ; 165.125,138.872 165.217,138.872 ; 165.125,143.977 165.735,143.977 ; 165.141,143.109 165.339,143.109 ; 165.171,138.857 165.217,138.857 ; 165.171,140.655 165.613,140.655 ; 165.171,143.078 165.4,143.078 ; 165.171,143.093 165.369,143.093 ; 165.171,143.124 165.339,143.124 ; 165.171,143.962 165.72,143.962 ; 165.171,144.755 166.131,144.755 ; 165.171,144.77 166.07,144.77 ; 165.171,144.785 166.086,144.785 ; 165.186,138.826 165.217,138.826 ; 165.186,138.841 165.217,138.841 ; 165.186,144.648 165.202,144.648 ; 165.202,143.215 165.217,143.215 ; 165.217,143.048 165.445,143.048 ; 165.232,143.032 165.476,143.032 ; 165.232,143.063 165.445,143.063 ; 165.247,144.8 165.933,144.8 ; 165.278,136.83 167.975,136.83 ; 165.278,142.987 165.491,142.987 ; 165.278,143.002 165.506,143.002 ; 165.278,143.017 165.506,143.017 ; 165.278,143.52 167.061,143.52 ; 165.278,143.551 165.293,143.551 ; 165.293,140.625 165.659,140.625 ; 165.308,143.535 167.061,143.535 ; 165.308,143.551 167.061,143.551 ; 165.324,140.64 165.644,140.64 ; 165.324,142.972 165.537,142.972 ; 165.339,140.609 165.659,140.609 ; 165.354,143.109 165.369,143.109 ; 165.354,143.124 165.369,143.124 ; 165.369,136.86 167.975,136.86 ; 165.369,136.876 167.975,136.876 ; 165.384,136.845 167.975,136.845 ; 165.384,142.926 165.598,142.926 ; 165.384,142.941 165.583,142.941 ; 165.384,142.956 165.598,142.956 ; 165.415,140.594 165.659,140.594 ; 165.491,140.564 165.659,140.564 ; 165.491,140.579 165.659,140.579 ; 165.491,142.865 165.659,142.865 ; 165.491,142.88 165.659,142.88 ; 165.491,142.895 165.644,142.895 ; 165.491,142.911 165.659,142.911 ; 165.506,136.891 167.975,136.891 ; 165.506,140.548 165.522,140.548 ; 165.506,142.819 165.659,142.819 ; 165.506,142.834 165.659,142.834 ; 165.506,142.85 165.659,142.85 ; 165.506,143.886 165.994,143.886 ; 165.522,140.716 165.537,140.716 ; 165.537,140.548 165.644,140.548 ; 165.537,142.804 165.705,142.804 ; 165.537,143.566 166.665,143.566 ; 165.552,136.906 167.975,136.906 ; 165.552,136.921 165.567,136.921 ; 165.552,140.518 165.644,140.518 ; 165.552,140.533 165.583,140.533 ; 165.552,142.758 165.705,142.758 ; 165.552,142.773 165.705,142.773 ; 165.552,142.789 165.705,142.789 ; 165.567,140.503 165.583,140.503 ; 165.583,136.921 167.975,136.921 ; 165.598,136.936 167.975,136.936 ; 165.598,142.712 165.735,142.712 ; 165.598,142.728 165.72,142.728 ; 165.598,142.743 165.72,142.743 ; 165.613,140.503 165.628,140.503 ; 165.613,140.533 165.628,140.533 ; 165.613,142.697 165.781,142.697 ; 165.644,136.967 167.975,136.967 ; 165.644,142.667 165.811,142.667 ; 165.644,142.682 165.811,142.682 ; 165.659,136.952 167.975,136.952 ; 165.659,136.982 167.975,136.982 ; 165.659,142.621 165.826,142.621 ; 165.659,142.636 165.826,142.636 ; 165.659,142.651 165.811,142.651 ; 165.659,143.596 166.527,143.596 ; 165.689,142.606 165.826,142.606 ; 165.705,142.56 165.872,142.56 ; 165.705,142.591 165.872,142.591 ; 165.705,143.581 166.512,143.581 ; 165.705,143.855 165.933,143.855 ; 165.72,142.545 165.887,142.545 ; 165.72,142.575 165.872,142.575 ; 165.72,143.612 166.512,143.612 ; 165.735,143.871 165.933,143.871 ; 165.75,136.997 167.975,136.997 ; 165.75,137.013 167.975,137.013 ; 165.765,137.028 167.975,137.028 ; 165.765,142.499 165.918,142.499 ; 165.765,142.514 165.918,142.514 ; 165.765,142.53 165.918,142.53 ; 165.781,143.84 165.903,143.84 ; 165.811,137.043 167.975,137.043 ; 165.811,142.438 165.933,142.438 ; 165.811,142.453 165.933,142.453 ; 165.811,142.469 165.933,142.469 ; 165.811,142.484 165.933,142.484 ; 165.826,137.058 167.975,137.058 ; 165.826,137.074 167.975,137.074 ; 165.826,137.089 165.842,137.089 ; 165.826,142.392 165.979,142.392 ; 165.826,142.408 165.979,142.408 ; 165.826,142.423 165.979,142.423 ; 165.842,142.606 165.857,142.606 ; 165.857,137.089 167.975,137.089 ; 165.872,142.331 166.025,142.331 ; 165.872,142.347 166.025,142.347 ; 165.872,142.362 166.025,142.362 ; 165.872,142.377 165.994,142.377 ; 165.872,144.694 166.619,144.694 ; 165.918,137.104 167.975,137.104 ; 165.918,137.119 167.96,137.119 ; 165.918,137.135 167.96,137.135 ; 165.918,142.27 166.086,142.27 ; 165.918,142.286 166.04,142.286 ; 165.918,142.301 166.07,142.301 ; 165.918,142.316 166.04,142.316 ; 165.918,143.977 166.207,143.977 ; 165.933,137.15 167.96,137.15 ; 165.933,142.24 166.086,142.24 ; 165.933,142.255 165.964,142.255 ; 165.964,143.962 166.223,143.962 ; 165.979,137.18 167.96,137.18 ; 165.979,142.164 166.086,142.164 ; 165.979,142.179 166.086,142.179 ; 165.979,142.194 166.086,142.194 ; 165.979,142.21 166.086,142.21 ; 165.979,142.225 166.086,142.225 ; 165.979,142.255 166.086,142.255 ; 165.994,137.196 167.96,137.196 ; 165.994,144.663 166.573,144.663 ; 166.009,143.886 166.025,143.886 ; 166.009,143.993 166.238,143.993 ; 166.025,137.165 167.96,137.165 ; 166.025,137.211 167.96,137.211 ; 166.025,142.118 166.146,142.118 ; 166.025,142.133 166.146,142.133 ; 166.025,142.149 166.146,142.149 ; 166.025,144.678 166.527,144.678 ; 166.04,137.226 167.96,137.226 ; 166.04,137.241 167.96,137.241 ; 166.04,142.057 166.207,142.057 ; 166.04,142.072 166.192,142.072 ; 166.04,142.088 166.192,142.088 ; 166.04,142.103 166.192,142.103 ; 166.07,137.257 167.96,137.257 ; 166.07,144.648 166.527,144.648 ; 166.086,137.272 167.96,137.272 ; 166.086,137.287 167.96,137.287 ; 166.086,137.302 167.945,137.302 ; 166.086,141.966 166.284,141.966 ; 166.086,141.981 166.284,141.981 ; 166.086,141.996 166.253,141.996 ; 166.086,142.011 166.238,142.011 ; 166.086,142.027 166.238,142.027 ; 166.086,142.042 166.238,142.042 ; 166.086,144.008 166.345,144.008 ; 166.086,144.023 166.345,144.023 ; 166.086,144.038 166.345,144.038 ; 166.101,142.164 166.131,142.164 ; 166.101,142.179 166.116,142.179 ; 166.101,142.194 166.116,142.194 ; 166.131,137.317 167.945,137.317 ; 166.131,141.95 166.299,141.95 ; 166.146,137.333 167.93,137.333 ; 166.146,137.348 167.93,137.348 ; 166.146,137.363 166.162,137.363 ; 166.146,141.905 166.299,141.905 ; 166.146,141.92 166.299,141.92 ; 166.146,141.935 166.299,141.935 ; 166.146,144.054 166.162,144.054 ; 166.177,137.363 167.93,137.363 ; 166.177,144.054 166.451,144.054 ; 166.192,137.378 167.93,137.378 ; 166.192,137.394 167.945,137.394 ; 166.192,137.409 167.93,137.409 ; 166.192,141.676 166.406,141.676 ; 166.192,141.691 166.39,141.691 ; 166.192,141.707 166.39,141.707 ; 166.192,141.722 166.39,141.722 ; 166.192,141.737 166.36,141.737 ; 166.192,141.752 166.36,141.752 ; 166.192,141.768 166.36,141.768 ; 166.192,141.783 166.36,141.783 ; 166.192,141.798 166.345,141.798 ; 166.192,141.813 166.345,141.813 ; 166.192,141.829 166.345,141.829 ; 166.192,141.844 166.314,141.844 ; 166.192,141.859 166.314,141.859 ; 166.192,141.874 166.314,141.874 ; 166.192,141.889 166.299,141.889 ; 166.192,144.069 166.634,144.069 ; 166.192,144.084 166.634,144.084 ; 166.192,144.099 166.68,144.099 ; 166.223,141.646 166.406,141.646 ; 166.223,144.709 166.238,144.709 ; 166.238,137.424 167.93,137.424 ; 166.238,141.585 166.421,141.585 ; 166.238,141.6 166.421,141.6 ; 166.238,141.615 166.421,141.615 ; 166.238,141.63 166.406,141.63 ; 166.238,141.661 166.406,141.661 ; 166.238,144.617 166.421,144.617 ; 166.238,144.633 166.467,144.633 ; 166.253,137.439 167.93,137.439 ; 166.253,137.455 167.93,137.455 ; 166.253,137.47 167.93,137.47 ; 166.253,141.432 166.284,141.432 ; 166.253,141.448 166.512,141.448 ; 166.253,141.463 166.467,141.463 ; 166.253,141.478 166.467,141.478 ; 166.253,141.493 166.467,141.493 ; 166.253,141.508 166.467,141.508 ; 166.253,141.524 166.451,141.524 ; 166.253,141.539 166.451,141.539 ; 166.253,141.554 166.451,141.554 ; 166.253,141.569 166.421,141.569 ; 166.253,144.602 166.467,144.602 ; 166.284,141.417 166.512,141.417 ; 166.299,137.485 167.93,137.485 ; 166.299,137.5 167.93,137.5 ; 166.299,137.516 167.93,137.516 ; 166.299,137.531 167.93,137.531 ; 166.299,141.356 166.527,141.356 ; 166.299,141.371 166.512,141.371 ; 166.299,141.387 166.512,141.387 ; 166.299,141.402 166.512,141.402 ; 166.299,141.432 166.482,141.432 ; 166.314,137.546 166.329,137.546 ; 166.314,137.561 167.914,137.561 ; 166.314,141.31 166.573,141.31 ; 166.314,141.326 166.558,141.326 ; 166.314,141.341 166.558,141.341 ; 166.314,144.13 166.787,144.13 ; 166.345,137.546 167.914,137.546 ; 166.345,137.577 167.914,137.577 ; 166.345,141.219 166.619,141.219 ; 166.345,141.249 166.573,141.249 ; 166.345,141.265 166.573,141.265 ; 166.345,141.28 166.573,141.28 ; 166.345,141.295 166.573,141.295 ; 166.345,144.115 166.787,144.115 ; 166.345,144.145 166.802,144.145 ; 166.36,137.592 167.914,137.592 ; 166.36,137.607 167.914,137.607 ; 166.36,137.622 167.914,137.622 ; 166.36,141.158 166.619,141.158 ; 166.36,141.173 166.619,141.173 ; 166.36,141.188 166.619,141.188 ; 166.36,141.204 166.619,141.204 ; 166.36,141.234 166.619,141.234 ; 166.39,141.143 166.619,141.143 ; 166.406,137.638 167.914,137.638 ; 166.406,137.653 167.914,137.653 ; 166.406,137.668 167.914,137.668 ; 166.406,141.051 166.619,141.051 ; 166.406,141.067 166.619,141.067 ; 166.406,141.082 166.619,141.082 ; 166.406,141.097 166.619,141.097 ; 166.406,141.112 166.619,141.112 ; 166.406,141.127 166.619,141.127 ; 166.421,137.683 167.914,137.683 ; 166.421,141.036 166.619,141.036 ; 166.436,141.569 166.451,141.569 ; 166.436,141.585 166.451,141.585 ; 166.436,141.6 166.451,141.6 ; 166.436,144.617 166.451,144.617 ; 166.436,144.709 166.71,144.709 ; 166.436,144.724 166.695,144.724 ; 166.436,144.739 166.695,144.739 ; 166.451,137.698 167.914,137.698 ; 166.451,137.714 167.914,137.714 ; 166.451,137.729 167.914,137.729 ; 166.451,140.929 166.619,140.929 ; 166.451,140.945 166.619,140.945 ; 166.451,140.96 166.619,140.96 ; 166.451,140.975 166.619,140.975 ; 166.451,140.99 166.619,140.99 ; 166.451,141.006 166.619,141.006 ; 166.451,141.021 166.619,141.021 ; 166.467,137.744 167.914,137.744 ; 166.467,140.823 166.634,140.823 ; 166.467,140.838 166.634,140.838 ; 166.467,140.853 166.634,140.853 ; 166.467,140.868 166.634,140.868 ; 166.467,140.884 166.619,140.884 ; 166.467,140.899 166.619,140.899 ; 166.467,140.914 166.619,140.914 ; 166.482,140.777 166.497,140.777 ; 166.482,140.792 166.68,140.792 ; 166.482,140.807 166.497,140.807 ; 166.482,144.755 166.497,144.755 ; 166.497,137.759 167.869,137.759 ; 166.497,141.432 166.512,141.432 ; 166.497,141.463 166.512,141.463 ; 166.512,137.775 167.869,137.775 ; 166.512,137.79 167.869,137.79 ; 166.512,137.805 167.869,137.805 ; 166.512,137.82 167.869,137.82 ; 166.512,137.836 167.869,137.836 ; 166.512,137.851 167.869,137.851 ; 166.512,140.655 166.68,140.655 ; 166.512,140.67 166.68,140.67 ; 166.512,140.686 166.68,140.686 ; 166.512,140.701 166.68,140.701 ; 166.512,140.716 166.68,140.716 ; 166.512,140.731 166.68,140.731 ; 166.512,140.746 166.68,140.746 ; 166.512,140.762 166.68,140.762 ; 166.512,140.777 166.68,140.777 ; 166.512,140.807 166.68,140.807 ; 166.512,143.474 167.213,143.474 ; 166.512,143.49 167.213,143.49 ; 166.512,143.505 167.213,143.505 ; 166.512,144.755 166.787,144.755 ; 166.512,144.77 166.802,144.77 ; 166.512,144.785 166.787,144.785 ; 166.527,137.866 167.869,137.866 ; 166.527,140.609 166.68,140.609 ; 166.527,140.625 166.68,140.625 ; 166.527,140.64 166.68,140.64 ; 166.543,137.881 167.869,137.881 ; 166.543,140.594 166.68,140.594 ; 166.543,144.678 166.573,144.678 ; 166.558,137.897 167.869,137.897 ; 166.558,140.457 166.726,140.457 ; 166.558,140.472 166.726,140.472 ; 166.558,140.487 166.726,140.487 ; 166.558,140.503 166.726,140.503 ; 166.558,140.518 166.726,140.518 ; 166.558,140.533 166.726,140.533